# Altium PCB RT5621 Main V3.3.PcbDoc (part 2 of 2)
Units mm, origin at the board's own origin, x right, y up, seen from the top; angles counter-clockwise.
Board outline 104 x 70 mm, 2 copper layers (Top Layer, Bottom Layer); 129 components, 94 nets, 375 pads, 418 vias.
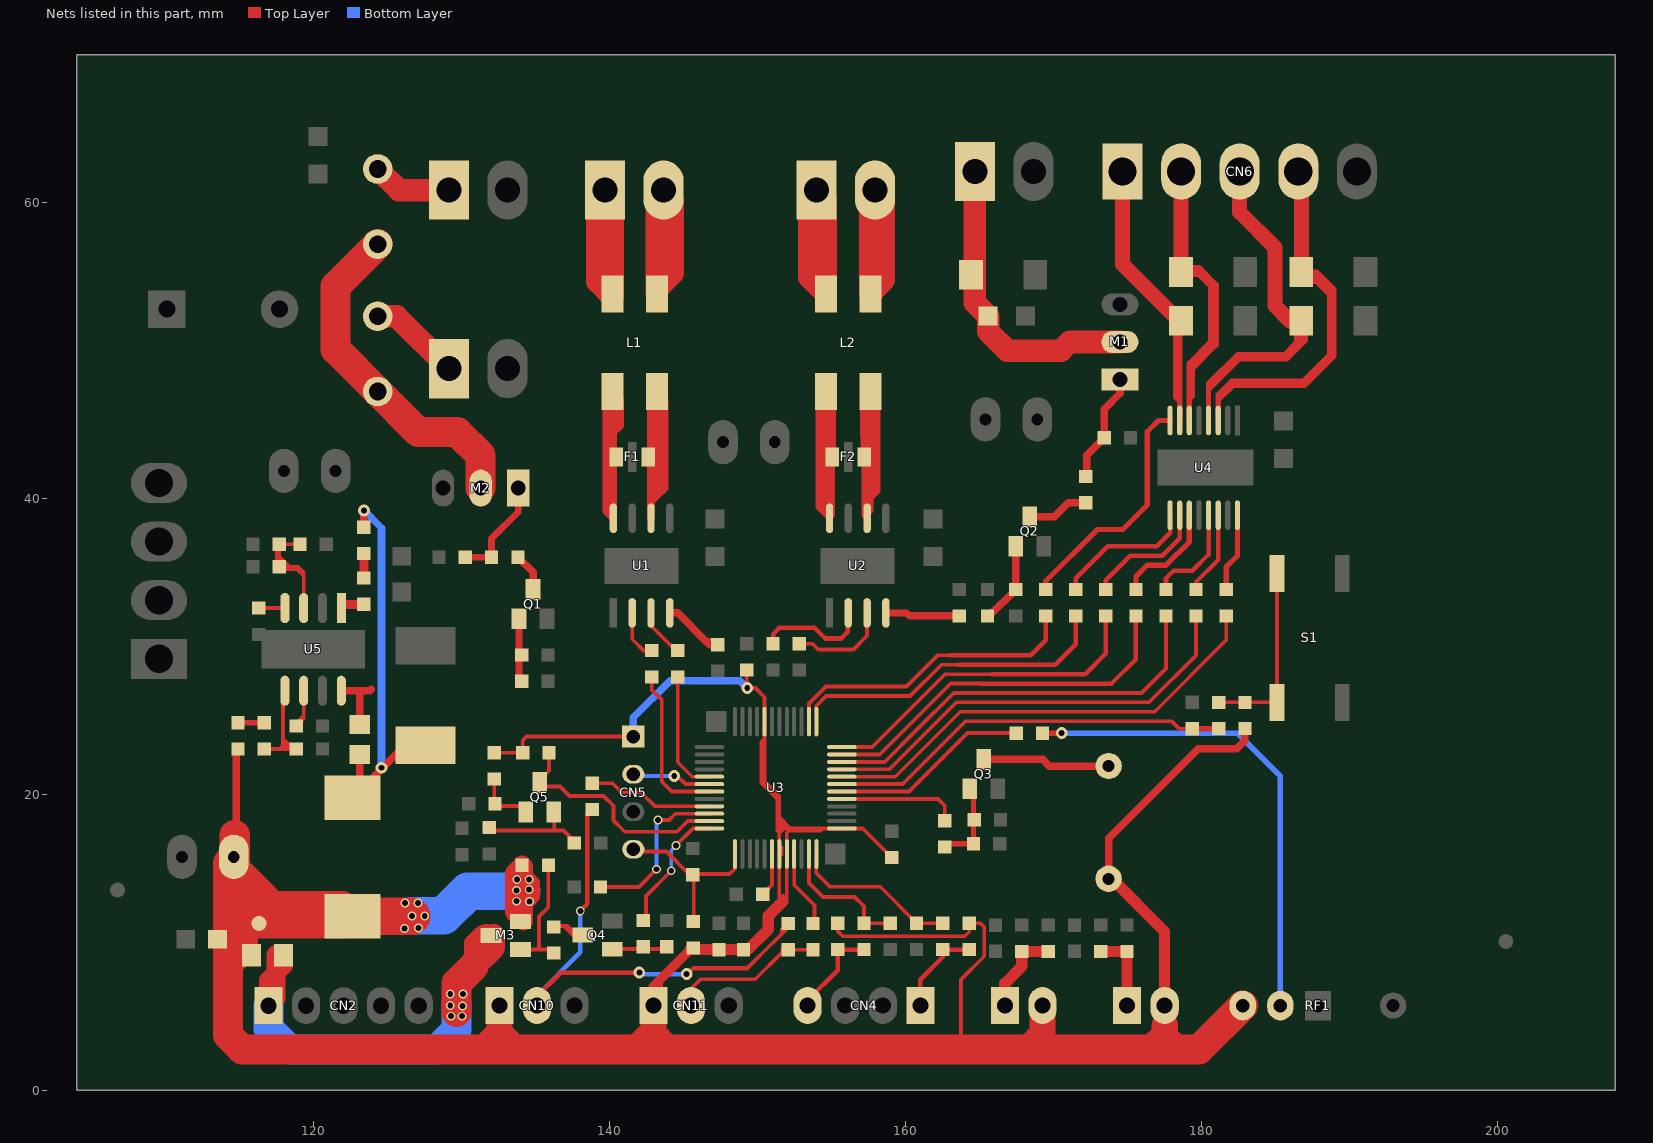
[diagram p2: the nets of this part, all layers, seen from the top]

## Via types
v1: diameter 0.8, hole 0.4, Top Layer to Bottom Layer, tented both sides, 268 vias
v2: diameter 0.6, hole 0.4, Top Layer to Bottom Layer, tented both sides, 99 vias
v3: diameter 0.5, hole 0.4, Top Layer to Bottom Layer, tented both sides, 51 vias

## Nets (pads, with @x,y where several pads share a name; then routed paths per layer and width w, separated by ;. In a path a pad name is that pad's centre, name@x,y a point inside that pad or via, vN(x,y) a via of type N, cw(c..) or ccw(c..) an arc to the next point about the centre after c; other vN are vias at no path point) (continued)
KEYIN1: C26.1 R38.2 U3.19 | length 28.2
  Top Layer w0.254: U3.19@154.913,20.697 U3.19@155.722,20.697 159.841,20.697 164.096,24.952 177.997,24.952 178.505,24.444 C26.1@179.405,24.444
  Top Layer w0.356: C26.1@179.405,24.444 R38.2@181.183,24.444
KNEADANTICLOCK: R2.1 U3.41 | length 8.4
  Top Layer w0.254: R2.1@144.624,27.946 144.624,22.178 145.605,21.197 U3.41@146.863,21.197
KNEADCLOCK: R1.1 U3.43 | length 11
  Top Layer w0.254: R1.1@142.869,27.946 142.869,27.057 143.555,26.371 143.555,20.859 144.218,20.197 U3.43@146.863,20.197
LED/STANDBY1: R26.2 U3.9 | length 4.9
  Top Layer w0.254: U3.9@152.497,15.972 152.497,13.877 153.868,12.506 R26.2@153.868,11.617
LED/STANDBY2: R51.2 U3.45 | length 8.7
  Top Layer w0.254: R51.2@138.856,20.758 140.228,20.758 140.837,20.148 142.133,20.148 143.084,19.197 U3.45@146.863,19.197
NetB1_2: B1.2 Q3.C | length 8.6
  Top Layer w0.508: Q3.C@165.308,22.38 169.282,22.38 169.745,21.918 B1.2@173.748,21.918
NetC5_1: C5.1 U3.6 | length 3.1
  Top Layer w0.254: C5.1@150.257,13.134 150.997,13.874 U3.6@150.997,15.972
NetC12_2: C12.2 Q3.B R19.2 R20.2 | length 5.6
  Top Layer w0.356: R19.2@162.681,16.44 162.907,16.665 164.612,16.665 Q3.B@164.612,20.192
NetC16_2: C16.2 CN9.1 D7.2 M1.2 | length 20.9
  Top Layer w1.524: CN9.1@164.713,62.109 164.713,53.217 C16.2@165.6,52.33 165.6,51.291 166.898,49.993 170.53,49.993 171.114,50.577 M1.2@174.518,50.577
NetC21_2: C21.2 U5.6 | length 3.6
  Top Layer w0.254: C21.2@118.866,24.593 C21.2@118.841,24.619 ; U5.6@119.349,27.006 119.349,25.355 ; C21.2@118.841,24.619 118.841,24.847 119.349,25.355 ; C21.2@118.841,24.619 119.349,25.127 119.349,25.355
NetC22_1: C22.1 U5.1 | length 1.6
  Top Layer w0.254: U5.1@121.889,32.594 U5.1@122.143,32.848
  Top Layer w0.61: U5.1@122.143,32.848 C22.1@123.413,32.848
NetC22_2: C22.2 R53.2 | length 1.7
  Top Layer w0.61: C22.2@123.413,34.626 R53.2@123.413,36.277
NetC24_2: C24.2 R43.2 R44.1 U5.3 | length 11.9
  Top Layer w0.254: C24.2@117.546,35.541 117.546,36.582 R43.2@117.698,36.734 ; U5.3@119.349,32.594 119.349,34.779 ; R44.1@119.349,36.658 R44.1@119.095,36.912 R43.2@117.698,36.912 R43.2@117.698,36.734 ; C24.2@117.698,35.388 117.876,35.21 118.917,35.21 ; C24.2@117.698,35.388 117.698,36.089 ; C24.2@117.698,35.388 118.399,35.388 ; 117.698,36.089 118.399,35.388 ; 117.698,36.089 R43.2@117.698,36.734 ; 118.399,35.388 118.739,35.388 ; 118.739,35.388 118.917,35.21 ; 118.739,35.388 118.968,35.388 119.349,35.007 119.349,34.779 ; 118.917,35.21 119.349,34.779
NetC34_1: C34.1 Q5.E R55.2 | length 6.7
  Top Layer w0.254: R55.2@132.151,17.557 136.276,17.557 ; Q5.E@136.276,18.478 136.276,17.557 ; C34.1@137.65,16.808 136.9,17.557 136.276,17.557
NetCN1_1: CN1.1 L1.3 | length 15.3
  Top Layer w1.524: L1.3@140.219,53.83 140.219,60.324 CN1.1@139.704,60.839 139.204,60.339 139.204,54.652 140.224,53.633 L1.3@140.224,53.83
NetCN1_2: CN1.2 L1.4 | length 14.6
  Top Layer w1.524: L1.4@143.214,54.141 L1.4@143.219,54.146 ; L1.4@143.219,53.83 L1.4@143.219,54.146 ; L1.4@143.219,54.146 143.219,60.394 CN1.2@143.664,60.839 144.284,60.219 144.284,55.211 L1.4@143.219,54.146
NetCN3_1: CN3.1 L2.3 | length 22.3
  Top Layer w1.524: L2.3@154.646,53.83 154.646,60.19 CN3.1@153.997,60.839 ; CN3.1@153.997,60.839 153.997,54.479 L2.3@154.646,53.83 154.645,53.817 153.505,54.957 153.505,60.347 CN3.1@153.997,60.839
NetCN3_2: CN3.2 L2.4 | length 22
  Top Layer w1.524: L2.4@157.657,53.956 L2.4@157.657,53.841 ; L2.4@157.657,53.841 157.657,53.877 L2.4@157.957,54.177 ; L2.4@157.657,53.841 L2.4@157.646,53.83 157.646,60.528 CN3.2@157.957,60.839 ; L2.4@157.657,53.841 157.957,54.141 L2.4@157.957,54.177 ; L2.4@157.957,54.177 CN3.2@157.957,60.839 ; L2.4@157.957,54.177 158.559,54.779 158.559,60.237 CN3.2@157.957,60.839
NetCN4_1: CN4.1 R6.1 R9.1 | length 6.6
  Top Layer w0.305: CN4.1@161.023,5.707 161.023,7.485 162.547,9.009 R9.1@162.547,9.517 162.801,9.263 162.801,9.517 R6.1@164.325,9.517
NetCN4_4: CN4.4 R7.1 R11.1 | length 6.5
  Top Layer w0.305: CN4.4@153.403,5.707 153.403,6.088 155.435,8.12 R7.1@155.435,9.517 156.76,9.517 ; 156.705,9.462 156.76,9.517 ; R11.1@157.213,9.517 156.76,9.517
NetCN10_2: CN10.2 R51.1 R52.2 | length 35.1
  Top Layer w0.254: 149.339,8.267 151.009,9.937 151.023,9.937 151.658,10.572 ; R52.2@151.658,10.928 151.658,10.572 ; R52.2@152.013,11.284 152.013,10.928 151.658,10.572
  Top Layer w0.305: CN10.2@135.115,5.707 135.115,6.358 136.713,7.956 v1(142.031,7.956) ; v2(138.043,12.122) 138.526,12.604 138.526,18.65 R51.1@138.856,18.98 ; v1(145.232,7.855) 145.282,7.855 145.695,8.267 149.339,8.267
  Bottom Layer w0.305: CN10.2@135.119,5.727 135.119,6.403 138.043,9.328 v2(138.043,12.122) ; v1(142.031,7.956) 142.031,7.896 142.073,7.855 v1(145.232,7.855)
NetCN11_2: CN11.2 R26.1 R52.1 | length 10.4
  Top Layer w0.254: CN11.2@145.529,5.707 145.529,6.866 146.168,7.505 149.86,7.505 151.704,9.348 R52.1@151.704,9.612 ; R52.1@152.013,9.506 R26.1@153.766,9.506
NetCN12_1: CN12.1 F4.1 | length 6.3
  Top Layer w1.524: F4.1@124.349,52.311 125.627,52.311 CN12.1@129.163,48.774
NetCN13_1: CN13.1 F3.1 | length 5.4
  Top Layer w1.524: F3.1@124.349,62.267 125.778,60.839 CN13.1@129.163,60.839
NetCN14_1: CN14.1 R45.2 R47.2 | length 5.9
  Top Layer w0.762: CN14.1@166.738,5.707 166.738,7.231 167.881,8.374 R47.2@167.881,9.39 R45.2@169.659,9.39
NetCN15_1: CN15.1 R46.2 R48.2 | length 5.5
  Top Layer w0.762: R48.2@173.215,9.39 R46.2@174.993,9.39 CN15.1@174.993,5.707
NetD1_2: D1.2 L3.1 L4.2 R53.1 | length 27.5
  Top Layer w0.254: L3.1@121.889,20.529 L3.1@122.651,19.767
  Top Layer w0.508: L3.1@122.651,19.767 L3.1@123.134,20.25 ; L4.2@123.134,22.688 L3.1@123.134,20.25 ; R53.1@123.413,38.055 v1(123.413,39.198) ; D1.2@126.156,23.247 126.131,23.247 L3.1@123.134,20.25
  Bottom Layer w0.508: v1(123.413,39.198) 124.607,38.004 v1(124.607,21.799)
NetF1_1: F1.1 L1.2 U1.8 | length 28.9
  Top Layer w0.508: L1.2@139.966,47.155 L1.2@139.966,46.676 ; L1.2@140.219,47.23 140.728,46.721 140.728,44.924 140.281,44.477 ; 139.799,39.474 139.799,39.146 U1.8@140.281,38.664 U1.8@140.281,38.992 ; 139.799,39.474 139.799,46.508 L1.2@139.966,46.676 ; 139.799,39.474 U1.8@140.281,38.992 ; L1.2@139.966,46.676 139.966,39.539 U1.8@140.281,39.225 ; L1.2@139.966,46.676 140.281,46.99 140.281,44.477 ; U1.8@140.281,38.992 U1.8@140.281,39.225 ; U1.8@140.281,39.225 140.281,44.477
NetF1_2: F1.2 L1.1 U1.6 | length 37.5
  Top Layer w0.508: U1.6@142.821,38.664 142.821,39.778 ; L1.1@142.821,47.01 142.821,40.489 ; L1.1@143.406,47.043 L1.1@143.406,46.939 ; 143.7,40.657 143.682,40.639 ; 142.821,39.778 142.821,40.006 ; 142.821,39.778 143.548,40.505 ; 142.821,40.006 142.821,40.246 ; 142.821,40.006 143.548,40.733 143.548,40.505 ; 142.821,40.246 142.821,40.489 ; 142.821,40.246 143.406,40.83 L1.1@143.406,46.939 ; 142.821,40.489 143.167,40.835 143.167,47.178 L1.1@143.406,46.939 ; L1.1@143.406,46.939 L1.1@143.682,46.662 ; 143.548,40.505 143.682,40.639 ; 143.682,40.639 143.733,40.69 143.733,46.612 L1.1@143.682,46.662 ; 143.682,40.639 L1.1@143.682,46.662
NetF2_1: F2.1 L2.2 U2.8 | length 35.4
  Top Layer w0.381: L2.2@154.14,47.885 154.14,39.41 U2.8@154.886,38.664 ; L2.2@154.886,46.841 154.886,44.477 ; L2.2@155.13,47.834 155.13,44.721 ; U2.8@154.886,38.664 155.076,38.854 F2.1@155.076,42.805 155.13,42.859 155.13,44.721 ; U2.8@154.886,38.664 154.886,39.225 154.886,44.477 ; 154.886,44.477 155.13,44.721
  Top Layer w0.508: L2.2@154.571,47.155 154.571,39.539 U2.8@154.886,39.225
NetF2_2: F2.2 L2.1 U2.6 | length 36.6
  Top Layer w0.381: F2.2@157.236,42.805 157.236,38.854 U2.6@157.426,38.664 U2.6@157.426,38.947 ; L2.1@157.646,47.23 157.426,47.01 157.426,44.076 157.426,40.489 ; L2.1@157.772,47.809 157.772,40.835 157.426,40.489 ; L2.1@158.153,47.961 158.153,40.733 ; U2.6@157.426,38.947 157.426,39.778 ; U2.6@157.426,38.947 157.652,39.173 157.652,40.004 ; 157.426,39.778 157.652,40.004 ; 157.426,39.778 157.426,40.006 ; 157.426,40.006 157.652,40.233 ; 157.426,40.006 157.426,40.489 ; 157.652,40.004 158.153,40.505 158.153,40.733 ; 157.652,40.004 157.652,40.233 ; 157.652,40.233 158.153,40.733
  Top Layer w0.508: L2.1@157.188,47.885 157.188,44.315 157.236,44.266 ; F2.2@157.236,42.805 157.236,44.266 ; 157.426,44.076 157.236,44.266
NetF3_2: F3.2 F4.2 M2.2 | length 24.1
  Top Layer w2.032: F3.2@124.349,57.187 121.505,54.343 121.505,50.075 F4.2@124.349,47.231 127.093,44.487 ; 127.931,44.487 127.093,44.487 ; M2.2@131.309,40.703 131.309,42.913 129.734,44.487 127.093,44.487
NetL4_1: L4.1 U5.8 | length 4.4
  Top Layer w0.508: U5.8@121.889,27.006 123.083,27.006 ; L4.1@123.134,24.72 123.134,26.955 123.083,27.006 ; 123.921,27.108 123.819,27.006 123.083,27.006
NetM1_1: M1.1 R28.1 R29.1 | length 7.5
  Top Layer w0.508: R29.1@172.203,41.49 172.283,41.57 172.283,42.932 R28.1@173.451,44.1 173.451,46.031 174.518,47.098 M1.1@174.518,48.037
NetM2_1: M2.1 R31.1 R32.1 | length 7.2
  Top Layer w0.457: R31.1@130.271,36.023 R32.1@132.049,36.023 132.049,37.293 133.849,39.093 M2.1@133.849,40.703
NetM3_G: M3.G R24.1 R35.2 | length 8.6
  Top Layer w0.254: M3.G@133.693,9.521 R35.2@136.367,9.521 ; 135.255,9.572 135.255,11.746 135.884,12.376 R24.1@135.884,15.221
NetQ1_B: Q1.B R30.2 R34.2 | length 4.3
  Top Layer w0.457: Q1.B@133.899,31.868 133.899,27.823 R34.2@134.081,27.641
NetQ1_C: Q1.C R32.2 | length 2.6
  Top Layer w0.508: R32.2@133.827,36.023 134.849,35.001 Q1.C@134.849,33.868
NetQ2_B: Q2.B R27.2 R33.2 | length 5.6
  Top Layer w0.508: R27.2@165.562,32.064 165.689,32.064 R33.2@167.467,33.842 167.467,36.771 Q2.B@167.468,36.772
NetQ2_C: Q2.C R29.2 | length 4.2
  Top Layer w0.508: Q2.C@168.418,38.772 170.079,38.772 171.019,39.712 R29.2@172.203,39.712
NetQ4_b: Q4.B R36.2 R49.2 | length 4
  Top Layer w0.254: Q4.B@139.789,9.546 R49.2@143.769,9.546
NetQ4_C: Q4.C R35.1 | length 2.8
  Top Layer w0.254: R35.1@136.342,11.106 136.926,11.106 ; 136.926,11.106 137.535,10.496 137.789,10.496 137.18,11.106 136.926,11.106
NetQ5_b: Q5.B R21.1 R22.2 | length 3.5
  Top Layer w0.254: R21.1@132.227,19.412 R22.2@132.227,21.037 ; R21.1@132.36,19.215 Q5.B@134.249,19.215
NetR1_2: R1.2 U1.2 | length 4.1
  Top Layer w0.254: U1.2@141.551,32.264 141.551,30.484 142.311,29.724 R1.2@142.844,29.724 ; R1.2@142.539,29.419 R1.2@142.844,29.724 ; R1.2@143.1,29.724 R1.2@142.869,29.724 R1.2@142.844,29.724
NetR2_2: R2.2 U1.3 | length 3.4
  Top Layer w0.254: U1.3@142.821,32.264 142.821,31.398 144.495,29.724 R2.2@144.624,29.724
NetR3_2: R3.2 U1.4 | length 5
  Top Layer w0.508: U1.4@144.091,32.264 144.624,32.264 146.566,30.322 ; 146.566,30.322 147.125,30.322 R3.2@147.336,30.111 146.777,30.111 146.566,30.322
NetR4_2: R4.2 U2.2 | length 8
  Top Layer w0.305: R4.2@151.072,30.185 151.072,30.838 151.482,31.248 153.893,31.248 154.604,30.537 155.671,30.537 156.128,30.994 U2.2@156.128,31.985 ; U2.2@156.23,31.581 U2.2@156.23,32.264
NetR5_2: R5.2 U2.3 | length 7
  Top Layer w0.254: R5.2@153.075,30.41 R5.2@152.85,30.185 153.737,30.185 154.122,29.8 156.509,29.8 157.426,30.717 U2.3@157.426,32.264
NetR10_2: R10.2 U2.4 | length 5
  Top Layer w0.495: U2.4@158.696,32.264 160.093,32.264 160.293,32.064 R10.2@163.657,32.064
NetR12_2: R12.2 U4.16 | length 5.3
  Top Layer w0.356: R12.2@181.691,33.842 181.691,35.366 182.453,36.128 U4.16@182.453,38.872
NetR13_2: R13.2 U4.14 | length 5.6
  Top Layer w0.305: R13.2@179.659,33.842 179.659,34.35 181.153,35.844 U4.14@181.153,38.872
NetR14_2: R14.2 U4.13 | length 7
  Top Layer w0.305: R14.2@177.627,33.842 177.627,34.604 178.135,35.112 179.405,35.112 180.503,36.21 U4.13@180.503,38.872
NetR15_2: R15.2 U4.11 | length 7.3
  Top Layer w0.356: R15.2@175.595,33.842 175.595,34.731 176.357,35.493 177.627,35.493 179.203,37.069 U4.11@179.203,38.872
NetR16_2: R16.2 U4.10 | length 8.4
  Top Layer w0.305: R16.2@173.563,33.842 173.563,34.477 175.214,36.128 177.373,36.128 178.553,37.308 U4.10@178.553,38.872
NetR17_2: R17.2 U4.9 | length 9.6
  Top Layer w0.305: R17.2@171.531,33.842 171.531,34.604 173.69,36.763 176.992,36.763 177.903,37.674 U4.9@177.903,38.872
NetR18_1: R18.1 U4.8 | length 16.4
  Top Layer w0.356: R18.1@169.499,33.842 169.499,34.418 172.988,37.906 174.706,37.906 176.357,39.557 176.357,44.51 177.119,45.272 U4.8@177.903,45.272
NetR25_1: R25.1 RF1.2 | length 32.8
  Top Layer w0.381: R25.1@169.282,24.142 v1(170.577,24.142)
  Bottom Layer w0.381: v1(170.577,24.142) 182.439,24.142 185.356,21.225 RF1.2@185.356,5.727
NetR37_1: R37.1 R38.1 S1.2 | length 12.7
  Top Layer w0.254: R38.1@181.183,26.222 S1.2@185.137,26.223 S1.2@185.137,34.923
NetR39_1: R39.1 U5.4 | length 1.8
  Top Layer w0.254: R39.1@116.301,32.594 U5.4@118.079,32.594
NetR40_1: R40.1 R41.2 | length 1.8
  Top Layer w0.356: R40.1@114.904,24.847 R41.2@116.682,24.847
NetR41_1: R41.1 R42.2 U5.5 | length 8.1
  Top Layer w0.254: R41.1@116.682,23.069 117.698,23.069 ; U5.5@117.952,27.006 117.952,23.704 ; 118.333,23.196 118.079,23.45 ; R42.2@118.587,23.196 117.952,23.704 ; R42.2@118.841,23.069 118.079,23.069 ; 117.698,23.069 117.952,23.323 ; 117.698,23.069 118.079,23.069 ; 117.952,23.323 118.079,23.45 ; 117.952,23.323 117.952,23.577 ; 117.952,23.577 117.952,23.704 ; 117.952,23.577 118.079,23.45 ; 118.079,23.069 118.079,23.45
NETWORK_ONOFF: R36.1 U3.48 | length 8.8
  Top Layer w0.254: R36.1@142.488,11.309 142.488,13.138 v2(144.19,14.84) ; v2(144.52,16.541) 144.52,16.567 145.651,17.697 U3.48@146.772,17.697
  Bottom Layer w0.254: v2(144.19,14.84) 144.19,16.211 v2(144.52,16.541)
RESET: C6.2 CN5.4 R8.1 U3.1 | length 12.4
  Top Layer w0.254: CN5.4@141.621,16.135 143.86,16.135 145.378,14.617 148.133,14.617 148.497,14.981 U3.1@148.497,16.422 ; R8.1@145.714,11.284 C6.2@145.714,14.459 ; C6.2@145.714,14.484 C6.2@145.714,14.459 ; C6.2@145.79,14.541 145.79,14.535 C6.2@145.714,14.459
RF_IN: R25.2 U3.18 | length 14.2
  Top Layer w0.254: U3.18@154.913,20.197 U3.18@155.722,20.197 160.257,20.197 164.202,24.142 R25.2@167.504,24.142
RX: Q5.C R23.1 U3.47 | length 16.4
  Top Layer w0.254: R23.1@135.935,22.815 135.935,21.596 135.224,20.885 135.224,20.529 136.672,20.529 137.307,19.894 139.618,19.894 140.279,19.234 140.279,18.243 141.015,17.507 141.041,17.507 141.066,17.481 144.586,17.481 145.301,18.197 U3.47@146.863,18.197
SPK: R19.1 U3.17 | length 9
  Top Layer w0.254: U3.17@154.913,19.697 U3.17@155.722,19.697 162.222,19.697 162.681,19.238 R19.1@162.681,18.218
SWIM: CN5.2 U3.42 | length 5.5
  Top Layer w0.254: v1(144.393,21.24) 144.599,21.24 145.142,20.697 U3.42@146.863,20.697
  Bottom Layer w0.254: CN5.2@141.621,21.24 v1(144.393,21.24)
TX: R54.2 U3.46 | length 11.4
  Top Layer w0.254: R54.2@139.415,13.747 142.006,13.747 v2(143.2,14.941) ; v2(143.301,18.269) 144.038,18.269 144.466,18.697 U3.46@146.863,18.697
  Bottom Layer w0.254: v2(143.2,14.941) 143.2,18.167 v2(143.301,18.269)
VAL1: CN6.4 D3.1 U4.3 | length 43.1
  Top Layer w0.35: U4.3@181.153,45.272 181.153,46.642 ; 181.153,46.642 182.153,47.641 186.998,47.641 188.979,49.622 188.979,53.814 ; 181.153,46.642 181.153,47.02 182.072,47.939 186.898,47.939 188.676,49.717 188.676,53.781 187.77,54.687 ; D3.1@187.152,55.305 D3.1@186.771,55.305 187.389,54.687 187.77,54.687 ; D3.1@187.152,55.305 187.77,54.687 ; D3.1@187.152,55.305 D3.1@187.488,55.305 ; D3.1@187.488,55.305 188.979,53.814 ; D3.1@187.488,55.305 187.791,55.305 188.979,54.118 188.979,53.814
  Top Layer w1.016: CN6.4@186.568,62.095 186.771,61.892 D3.1@186.771,55.305
VAL2: CN6.3 D4.1 U4.4 | length 34.3
  Top Layer w0.35: U4.4@180.503,45.272 180.503,47.37 ; D4.1@186.771,52.003 D4.1@186.726,51.958 ; 180.503,47.37 182.553,49.419 185.778,49.419 187.048,50.689 187.048,51.636 D4.1@186.726,51.958 ; 180.503,47.37 180.503,47.767 182.453,49.717 185.628,49.717 186.456,50.545 ; 186.456,50.545 186.456,51.688 D4.1@186.726,51.958 ; 186.456,50.545 186.726,50.815 D4.1@186.726,51.958
  Top Layer w1.016: CN6.3@182.608,62.095 182.608,59.341 184.993,56.956 184.993,53.019 186.009,52.003 D4.1@186.771,52.003
VAL3: CN6.2 D5.1 U4.6 | length 39.8
  Top Layer w0.35: U4.6@179.203,45.272 179.203,46.705 ; D5.1@178.648,55.31 D5.1@178.643,55.305 D5.1@178.653,55.305 ; D5.1@178.648,55.31 178.927,55.589 179.887,55.589 181.029,54.448 181.029,50.664 ; D5.1@178.648,55.31 D5.1@178.653,55.305 ; D5.1@178.653,55.305 178.814,55.145 179.86,55.145 ; D5.1@178.653,55.305 179.913,55.305 180.074,55.145 ; 179.203,46.705 179.428,46.93 179.428,48.784 ; 179.203,46.705 179.203,49.134 180.64,50.571 ; 179.428,48.784 181.029,50.384 181.029,50.664 ; 179.428,48.784 179.428,49.063 181.029,50.664 ; 179.86,55.145 180.074,55.145 ; 179.86,55.145 180.64,54.365 ; 180.074,55.145 180.802,54.416 180.802,54.203 ; 180.64,50.571 180.64,54.365 ; 180.64,50.571 180.802,50.733 180.802,54.203 ; 180.64,54.365 180.802,54.203
  Top Layer w1.016: D5.1@178.648,55.31 CN6.2@178.648,62.095
VAL4: CN6.1 D6.1 U4.7 | length 24.1
  Top Layer w0.35: U4.7@178.553,45.272 178.553,46.56 ; 178.553,46.56 178.26,46.854 178.26,51.747 178.516,52.003 178.553,51.966 178.553,46.56
  Top Layer w1.016: CN6.1@174.688,62.095 174.688,55.831 D6.1@178.516,52.003
VALVE1: R13.1 U3.21 | length 30.6
  Top Layer w0.254: U3.21@154.913,21.697 U3.21@155.722,21.697 158.936,21.697 163.461,26.222 176.484,26.222 179.659,29.397 R13.1@179.659,32.064
VALVE2: R14.1 U3.22 | length 29.3
  Top Layer w0.254: U3.22@154.913,22.197 U3.22@155.722,22.197 158.616,22.197 160.802,24.383 ; 161.081,24.662 160.802,24.383 ; R14.1@177.627,32.064 177.627,28.508 175.976,26.857 163.276,26.857 160.802,24.383
VALVE3: R15.1 U3.23 | length 26.3
  Top Layer w0.254: U3.23@154.913,22.697 158.285,22.697 163.08,27.492 165.091,27.492
  Top Layer w0.305: 165.091,27.492 173.944,27.492 175.595,29.143 R15.1@175.595,32.064
VALVE4: R16.1 U3.24 | length 23.8
  Top Layer w0.254: U3.24@154.913,23.197 157.769,23.197 162.699,28.127 165.853,28.127
  Top Layer w0.305: 165.853,28.127 172.166,28.127 173.563,29.524 R16.1@173.563,32.064
VALVEENABLE: R18.2 U3.26 | length 20.6
  Top Layer w0.254: U3.26@153.497,24.922 153.497,26.138 154.644,27.286 160.08,27.286 162.191,29.397 163.059,29.397
  Top Layer w0.305: 163.059,29.397 168.483,29.397 169.499,30.413 R18.2@169.499,32.064
VALVEFAULT: R12.1 U3.20 | length 32.2
  Top Layer w0.254: U3.20@154.913,21.197 159.325,21.197 163.715,25.587 176.865,25.587 181.691,30.413 R12.1@181.691,32.064
VALVERESET: R17.1 U3.25 | length 22.2
  Top Layer w0.254: U3.25@153.997,24.922 153.997,25.992 154.655,26.651 160.334,26.651 162.445,28.762 163.567,28.762
  Top Layer w0.305: 163.567,28.762 170.134,28.762 171.531,30.159 R17.1@171.531,32.064
VCC: B1.1 C3.2 C4.2 C27.2 C28.1 C32.1 C33.1 CN5.1 CN10.1 CN11.1 CN14.2 CN15.2 L3.2 M3.S pad.0@116.326,11.284 R6.2 R7.2 R8.2 R22.1 R23.2 R24.2 R37.2 R40.2 R56.1 RF1.3 U3.7 U3.8 U3.13 U3.32 | length 300.6
  Top Layer w0.254: R22.1@132.227,22.815 R23.2@134.157,22.815 134.157,23.653 134.411,23.907 CN5.1@141.625,23.907 ; CN11.1@142.989,5.707 CN11.1@142.989,5.731 ; CN11.1@143.504,6.238 143.504,7.27 ; R8.2@145.471,9.517 R8.2@145.46,9.506 ; R8.2@145.714,9.48 143.504,7.27 ; R8.2@145.714,9.506 R8.2@145.46,9.506 ; v1@149.294,27.137 C33.1@149.294,28.407 ; v1(149.323,27.184) 149.88,27.184 150.497,26.567 U3.32@150.497,24.922 150.497,23.762 ; 151.497,12.283 151.497,12.291 ; 151.638,15.972 151.638,16.422 ; 151.734,13.138 151.734,12.782 151.734,12.528 ; 151.865,13.006 151.865,12.66 ; R7.2@155.435,11.295 155.435,10.76 155.775,10.42 164.03,10.42 164.325,10.715 R6.2@164.325,11.295 165.087,11.295 165.341,11.041 165.341,9.064 163.776,7.499 163.776,2.76 ; C4.2@158.821,16.008 157.132,17.697 U3.13@155.722,17.697 154.426,17.697 ; CN11.1@142.989,5.731 142.768,5.952 142.768,7.093 145.181,9.506 R8.2@145.46,9.506 ; CN11.1@142.989,5.731 CN11.1@142.993,5.727 143.162,5.896 143.162,6.928 143.504,7.27 ; CN11.1@142.989,5.731 142.989,7.034 R8.2@145.46,9.506 ; 150.497,23.762 150.286,23.552 150.286,20.758 151.353,19.691 151.353,18.573 ; 150.497,23.762 150.497,20.877 151.497,19.877 151.497,18.43 ; 151.353,18.294 151.497,18.15 ; 151.353,18.294 151.353,17.566 151.497,17.422 ; 151.353,18.294 151.353,18.573 ; 151.353,18.573 151.497,18.43 ; 151.497,12.291 151.734,12.528 ; 151.497,12.291 151.497,12.545 U3.7@151.497,15.972 151.497,17.422 ; 151.497,17.422 151.772,17.697 ; 151.497,17.422 151.497,17.972 ; 151.497,17.972 151.772,17.697 ; 151.497,17.972 151.497,18.15 ; 151.497,18.15 151.95,17.697 ; 151.497,18.15 151.497,18.43 ; 151.497,18.43 152.229,17.697 ; 151.734,12.528 151.865,12.66 ; 151.772,17.697 151.95,17.697 ; 151.865,12.66 151.997,12.791 U3.8@151.997,15.972 151.997,17.414 152.138,17.555 ; 151.95,17.697 152.229,17.697 ; 152.138,17.555 154.285,17.555 154.426,17.697 ; 152.138,17.555 152.28,17.697 ; 152.229,17.697 152.28,17.697 ; 152.28,17.697 154.426,17.697
  Top Layer w0.508: C28.1@114.333,14.395 114.688,14.751 114.815,14.878 114.777,14.916 R40.2@114.777,23.069 ; B1.1@173.748,14.298 173.748,17.026 179.798,23.075 182.414,23.075 182.961,23.623 R37.2@182.961,24.444 R37.2@182.842,24.325
  Top Layer w0.762: R24.2@134.106,14.89 134.106,14.865 134.201,14.77 134.945,14.027 134.945,13.087 v2(134.614,12.757) 134.201,12.344 ; R8.2@145.471,9.517 149.383,9.517 150.743,10.877 150.743,11.792 151.497,12.545 151.734,12.782 ; B1.1@173.748,14.298 173.967,14.298 177.533,10.732 CN15.2@177.533,4.945 ; CN15.2@177.537,5.727 177.537,4.388 179.164,2.76
  Top Layer w1.27: 133.573,12.049 133.573,14.687 R24.2@134.106,15.221 134.201,15.126 134.201,14.77 134.201,12.344 134.201,11.421 133.573,12.049
  Top Layer w1.778: 131.432,2.76 132.579,3.907 ; CN10.1@132.579,5.727 132.579,3.907 ; 133.693,2.76 132.579,3.874 132.579,3.907 ; 141.726,2.76 142.993,4.027 ; CN11.1@142.993,5.727 142.993,4.027 ; 144.056,2.76 142.993,3.823 142.993,4.027 ; 168.215,2.76 169.282,3.827 ; 169.282,2.76 169.282,3.827 ; CN14.2@169.282,5.727 169.282,3.827 ; 176.517,2.76 177.537,3.78 177.537,4.388
  Top Layer w2.032: C28.1@114.625,15.779 114.218,15.373 C28.1@114.218,14.84 ; C28.1@114.688,14.751 C28.1@114.688,15.31 ; C28.1@114.688,17.265 C28.1@114.688,15.31 ; C28.1@114.815,14.878 115.26,14.433 ; pad.0@115.818,11.284 pad.0@116.326,11.284 117.442,11.284 ; 116.771,12.922 115.26,14.433 ; 117.926,11.767 117.442,11.284 ; L3.2@122.601,11.817 121.966,12.452 117.241,12.452 117.876,11.817 115.26,11.817 ; L3.2@122.651,11.767 122.167,11.284 117.442,11.284 ; RF1.3@182.816,5.727 179.849,2.76 179.164,2.76 176.517,2.76 169.282,2.76 168.215,2.76 163.776,2.76 144.056,2.76 141.726,2.76 133.693,2.76 131.432,2.76 115.198,2.76 114.218,3.74 114.218,8.54 ; 114.218,8.54 C28.1@114.218,14.84 ; 114.218,8.54 115.26,9.582 115.26,11.817 ; C28.1@114.218,14.84 C28.1@114.688,15.31 ; 115.26,11.817 115.26,14.433
  Top Layer w2.54: L3.2@122.651,11.767 v2@126.664,11.767
  Bottom Layer w0.508: CN5.1@141.621,23.907 141.621,25.197 144.116,27.692 148.815,27.692 v1(149.323,27.184)
  Bottom Layer w2.54: v2(126.664,11.792) 128.798,11.792 130.449,13.443 134.081,13.443
  other v2: 126.156,10.928 127.096,10.979 127.528,11.792 126.207,12.655 127.071,12.655 133.725,12.782 133.725,13.519 134.589,13.57 133.751,14.255 134.589,14.255
VCC_NETWORK: CN2.1 M3.D R56.2 | length 37.7
  Top Layer w1.27: R56.2@117.495,9.175 117.469,9.15 117.469,7.931 ; R56.2@117.983,9.119 117.983,8.444 117.469,7.931 ; 129.687,7.118 130.83,8.261 130.83,8.388 130.83,9.937 M3.D@131.414,10.522 ; 117.469,7.931 116.961,7.423 CN2.1@116.961,5.721 117.469,6.229 117.469,7.931
  Top Layer w1.524: 129.687,7.118 129.687,7.245 ; 130.83,8.261 132.201,9.633 M3.D@132.201,10.471 ; 130.83,8.388 131.693,9.252 M3.D@131.693,10.471
  Top Layer w2.032: 129.687,5.289 129.687,7.118 ; 129.687,7.245 130.83,8.388
  Bottom Layer w2.032: CN2.1@116.961,5.721 116.961,4.197 118.409,2.749 128.341,2.749 129.661,4.07 129.661,5.95
  other v2: 129.306,5.01 130.042,5.01 130.093,5.696 129.255,5.721 129.255,6.508 130.119,6.508
WALKDOWNSWITCH: C9.1 R9.2 U3.12 | length 11.3
  Top Layer w0.254: U3.12@153.997,15.972 153.997,14.67 154.911,13.755 158.309,13.755 C9.1@160.769,11.295 R9.2@162.547,11.295
WALKUPSWITCH: C10.1 R11.2 U3.11 | length 9.2
  Top Layer w0.254: U3.11@153.497,15.972 153.497,14.02 154.444,13.073 156.578,13.073 157.213,12.438 R11.2@157.213,11.295 C10.1@158.991,11.295
pads on no net: U3.0 U3.2 U3.3 U3.10 U3.30 U3.33 U3.34 U3.35 U3.36 U3.37 U3.38 U3.39 U3.40 U4.15

## Polygon pours and split planes (outlines as drawn)
GND on Bottom Layer "Bottom Layer-No Net" (solid, remove dead copper, pour order 4): 104,70 104,0 190.596,0 190.596,43.389 195.041,47.834 195.676,48.469 195.676,50.501 195.676,70 104,70
GND on Top Layer "Bottom Layer-No Net" (solid, remove dead copper, pour order 3): 104,70 104,0 190.596,0 190.596,43.389 195.041,47.834 195.676,48.469 195.676,50.501 195.676,70 104,70

## Keep-outs
Keep-Out Layer:
  circle w0.127: c204,65 r1.75
  circle w0.127: c204,5 r1.75
  circle w0.127: c109,5 r1.75
  circle w0.127: c109,65 r1.75
  circle w0.127: c99,5 r1.75
  circle w0.127: c99,65 r1.75
  circle w0.127: c4,65 r1.75
  circle w0.127: c4,5 r1.75
  circle w0.127: c109,135 r1.75
  circle w0.127: c109,75 r1.75
  circle w0.127: c204,75 r1.75
  circle w0.127: c204,135 r1.75
  circle w0.127: c99,75 r1.75
  circle w0.127: c99,135 r1.75
  circle w0.127: c4,135 r1.75
  circle w0.127: c4,75 r1.75
  lines w0.127: 0,70 0,0 104,0 ; 0,70 104,70 ; 0,70 0,140 104,140 ; 0,70 104,70 ; 104,0 104,70 ; 104,0 208,0 208,70 ; 104,0 104,70 ; 104,0 104,70 ; 104,0 104,70 ; 104,70 208,70 ; 104,70 104,140 ; 104,70 208,70 ; 104,70 104,140 ; 104,70 104,140 ; 104,70 104,140 ; 104,140 208,140 208,70

## Other copper
Top Layer:
  rectangle net GND: 104.109,0.093 104.583,69.892
  rectangle net DC24V: 181.622,44.27 187.414,46.276
  rectangle net GND: 104.583,69.292 195.676,69.892
  rectangle net GND: 104.583,0.093 190.596,0.708
  rectangle net DC24V: 158.442,37.598 162.506,39.757
  rectangle net DC24V: 143.837,37.598 147.774,39.757
  rectangle net DC24V: 181.691,44.51 183.774,46.034
  rectangle net GND: 149.997,14.398 150.374,17.767
  rectangle net VCC: 151.545,12.909 151.997,17.811
  rectangle net NetL4_1: 121.584,24.085 124.327,28.048
  rectangle net NetD1_2: 121.61,18.243 129.255,23.349
  pour cut-out: 116.961,21.469 116.961,10.046 128.315,10.046 128.315,21.19 127.833,21.672 117.165,21.672
  pour cut-out: 135.816,64.408 135.816,51.911 136.959,50.768 136.959,47.074 139.056,44.977 144.91,44.977 146.18,46.247 146.18,50.565 147.221,51.606 147.221,64.23 145.976,65.475 136.883,65.475
  pour cut-out: 149.312,64.408 149.312,51.911 150.455,50.768 150.455,46.679 152.043,45.091 157.594,45.091 159.675,47.172 159.675,50.565 160.717,51.606 160.717,64.23 159.472,65.475 150.379,65.475
  pour cut-out: 105.104,63.954 ccw(c109.641,65.515) 105.319,63.431 ccw(c108.962,64.951) 112.235,62.745 ccw(c110.419,64.572) 112.967,64.949 ccw(c107.585,64.566) 111.772,67.969 ccw(c108.966,64.577) 107.868,68.84 ccw(c108.699,65.318) 105.215,66.297 ccw(c108.103,64.986) 105.104,63.954 cw(c108.103,64.986)
  pour cut-out: 105.12,3.963 ccw(c109.657,5.523) 105.335,3.44 ccw(c108.978,4.96) 112.251,2.754 ccw(c110.435,4.58) 112.983,4.958 ccw(c107.601,4.574) 111.805,7.956 ccw(c109.046,4.411) 107.797,8.726 ccw(c108.598,5.307) 105.231,6.305 ccw(c108.12,4.995) 105.12,3.963 cw(c108.12,4.995)
Bottom Layer:
  rectangle net GND: 104.109,0.093 104.583,69.892
  rectangle net GND: 104.583,69.292 195.676,69.892
  rectangle net GND: 104.583,0.093 190.596,0.708
  pour cut-out: 116.961,21.469 116.961,10.046 128.315,10.046 128.315,21.19 127.833,21.672 117.165,21.672
  pour cut-out: 149.312,64.408 149.312,51.911 150.455,50.768 150.455,46.679 151.916,45.218 157.486,45.218 159.675,47.408 159.675,50.565 160.717,51.606 160.717,64.23 159.472,65.475 150.379,65.475
  pour cut-out: 135.816,64.408 135.816,51.911 136.959,50.768 136.959,47.136 138.61,45.485 144.884,45.485 146.18,46.78 146.18,50.565 147.221,51.606 147.221,64.23 145.976,65.475 136.883,65.475

## Silkscreen, mask and mechanical layers (free items; w line width, h text height)
Top Overlay:
  circle w0.127: c200.596,10.061 r1.016
  circle w0.127: c106.776,13.544 r1.016
  circle w0.127: c204,5 r3
  circle w0.127: c204,65 r3
  circle w0.127: c116.326,11.284 r1.016
  circle w0.127: c109,5 r4
  circle w0.127: c109,65 r4
  lines w0.127: 1.384,15.517 2.4,15.517 1.384,13.866 1.384,47.902 ; 1.384,85.517 2.4,85.517 1.384,83.866 1.384,117.902 ; 116.994,21.723 118.358,21.723 118.79,22.155 ; 169.888,8.608 170.015,8.481 176.492,8.481 176.492,8.678 ; 175.755,8.704 180.27,8.704 ; 175.755,11.853 180.27,11.853 ; 180.636,57.095 180.636,67.551 ; 206.616,22.098 206.616,56.134 205.6,54.483 206.616,54.483 ; 206.616,92.098 206.616,126.134 205.6,124.483 206.616,124.483
  text "Pump" at 167.449,68.026 h0.97
  text "Valve" at 180.213,67.86 h0.97
  text "1" at 186.55,67.835 h0.97
  text "4" at 174.041,67.811 h0.97
  text "+24V" at 188.747,67.759 h0.97
  text "Walk" at 156.781,66.723 h0.97
  text "Hot-L" at 130.878,66.683 h0.97
  text "Knead" at 141.352,66.668 h0.97
  text "5PIN" at 175.022,66.103 h0.97
  text "3PIN" at 185.259,66.052 h0.97
  text "Hot-R" at 130.953,54.508 h0.97
  text "+24V" at 107.157,43.77 h0.97
  text "RT-5621Main V3.3" at 162.504,28.2 h0.97
  text "20181225" at 162.453,26.828 h0.97
  text "GND" at 108.935,25.584 h0.97
  text "2LMD5621330" at 162.453,25.508 h0.97
  text "V" at 143.555,24.339 h0.97
  text "S" at 143.606,23.044 h0.97
  text "G" at 143.53,21.825 h0.97
  text "R" at 143.606,20.58 h0.97
  text "GND" at 105.912,11.284 h0.97
  text "GND" at 123.101,1.109 h0.97
  text "GND" at 126.149,1.109 h0.97
  text "LED-L" at 134.023,1.109 h0.97
  text "LED-R" at 144.691,1.109 h0.97
  text "WalkSwitch" at 154.089,1.109 h0.97
  text "AD-L" at 167.805,1.109 h0.97
  text "VCC" at 115.628,1.058 h0.97
  text "AD-R" at 176.517,1.058 h0.97
  text "OUT" at 185.843,1.053 h0.97 r90
  text "TX" at 118.603,1.008 h0.97
  text "RX" at 121.128,1.008 h0.97
  text "VCC" at 183.328,1.028 h0.97 r90
  text "ANT" at 193.234,1.003 h0.97 r90
  text "GND" at 188.408,0.977 h0.97 r90
Bottom Overlay:
  text "WalkDown" at 159.487,14.598 h0.97 r90
  text "WalkUp" at 152.223,13.074 h0.97 r90
  text "LED-R" at 144.552,12.287 h0.97 r90
  text "LED-L" at 134.24,11.931 h0.97 r90
  text "GND" at 125.045,11.169 h0.97 r90
  text "GND" at 127.73,11.145 h0.97 r90
  text "RX" at 122.454,10.966 h0.97 r90
  text "TX" at 120.041,10.737 h0.97 r90
  text "VCC" at 117.577,10.61 h0.97 r90
  text "VCC" at 141.809,10.458 h0.97 r90
  text "GND" at 147.117,10.407 h0.97 r90
  text "VCC" at 131.496,10.102 h0.97 r90
  text "GND" at 136.805,10.052 h0.97 r90

## Text inside footprints (layer, text, board x,y; h text height)
B1: Top Overlay "-" at 176.835,21.321 h0.97 r90; Top Overlay "+" at 176.708,14.26 h0.97 r90
C2: Top Overlay "+" at 145.427,43.121 h0.97
C8: Top Overlay "+" at 163.166,44.659 h0.97
C28: Top Overlay "+" at 115.107,20.453 h0.97 r180
C36: Top Overlay "+" at 123.769,42.551 h0.97 r180
CN1: Top Overlay "1" at 139.577,56.902 h0.97
CN2: Top Overlay "1" at 116.961,7.372 h0.97; Top Overlay "5" at 126.74,7.372 h0.97
CN3: Top Overlay "1" at 153.87,56.902 h0.97
CN4: Top Overlay "1" at 160.647,7.452 h0.97; Top Overlay "4" at 153.28,7.378 h0.97
CN6: Top Overlay "1" at 174.561,58.158 h0.97
CN7: Top Overlay "1" at 113.507,29.038 h0.97 r90
CN9: Top Overlay "1" at 164.586,58.172 h0.97
CN10: Top Overlay "3" at 137.405,7.378 h0.97; Top Overlay "1" at 132.452,7.378 h0.97; Top Overlay "2" at 134.865,7.378 h0.97
CN11: Top Overlay "3" at 147.819,7.378 h0.97; Top Overlay "1" at 142.866,7.378 h0.97; Top Overlay "2" at 145.279,7.378 h0.97
CN12: Top Overlay "1" at 129.036,44.837 h0.97
CN13: Top Overlay "1" at 129.036,56.902 h0.97
CN14: Top Overlay "1" at 166.615,7.378 h0.97; Top Overlay "2" at 169.028,7.378 h0.97
CN15: Top Overlay "1" at 174.87,7.378 h0.97; Top Overlay "2" at 177.283,7.378 h0.97
D1: Top Overlay "+" at 129.915,32.569 h0.97 r270
D3: Top Overlay "+" at 184.717,54.806 h0.97
D4: Top Overlay "+" at 184.717,51.504 h0.97
D5: Top Overlay "+" at 176.589,54.806 h0.97
D6: Top Overlay "+" at 176.589,51.504 h0.97
D7: Top Overlay "+" at 170.841,55.623 h0.97 r180
U1: Top Overlay "1" at 139.722,32.112 h0.97 r90
U2: Top Overlay "1" at 154.553,31.985 h0.97 r90
U3: Top Overlay "1" at 147.945,15.069 h0.97 r90
U4: Top Overlay "1" at 181.945,46.923 h0.97 r270